# EAGLE board reaction_wheel_board (EAGLE 8.4.1)
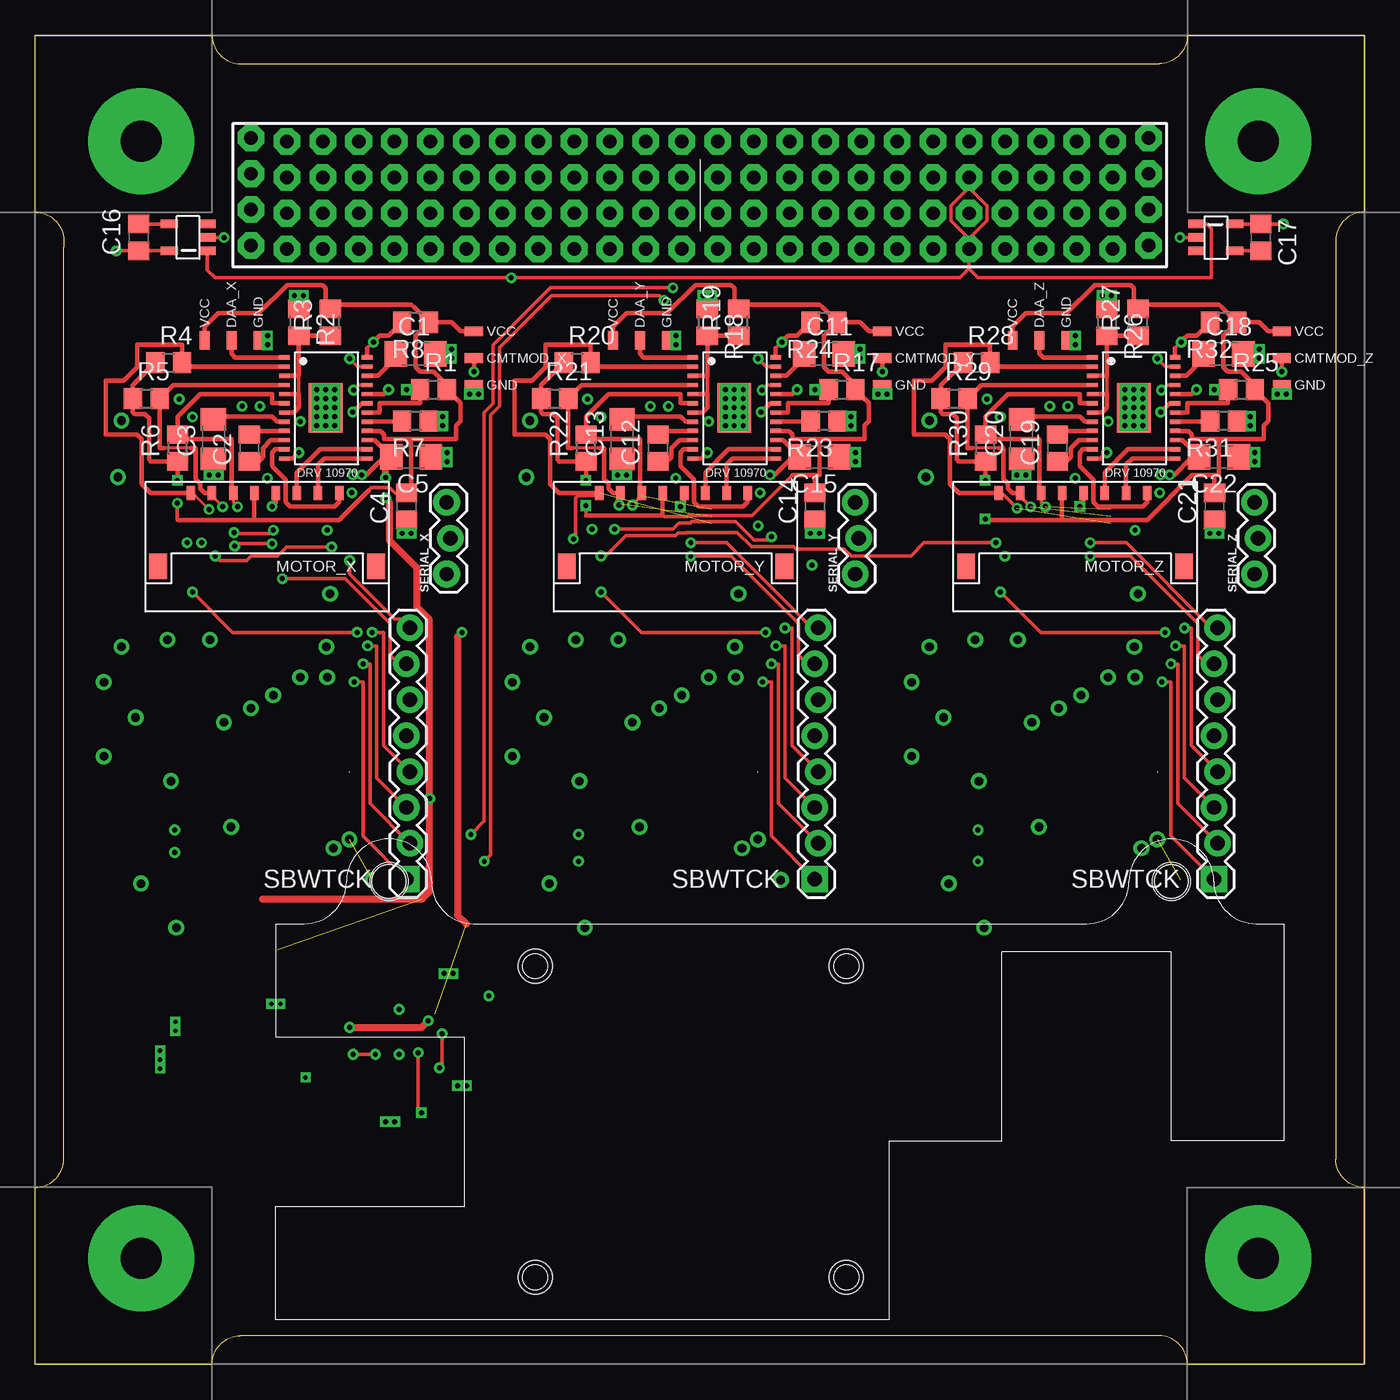
[diagram p0: board, top side]
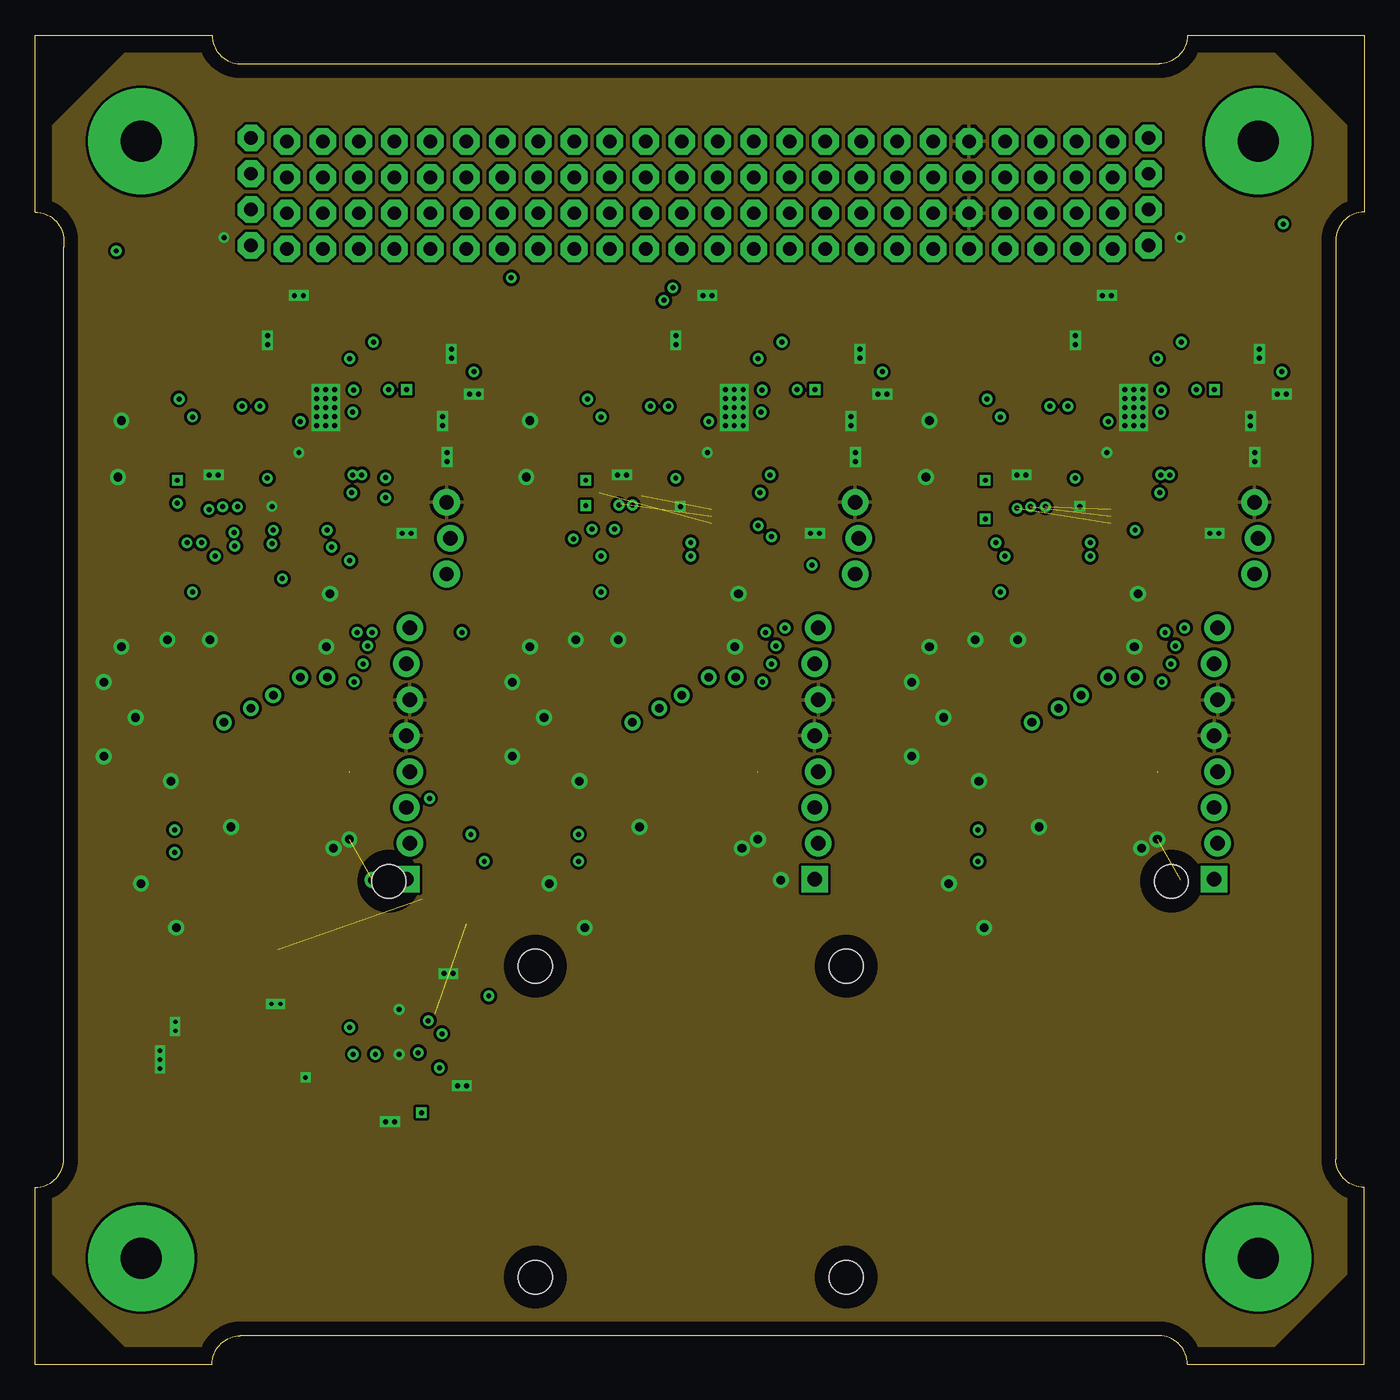
[diagram p1: board, inner layer Ground]
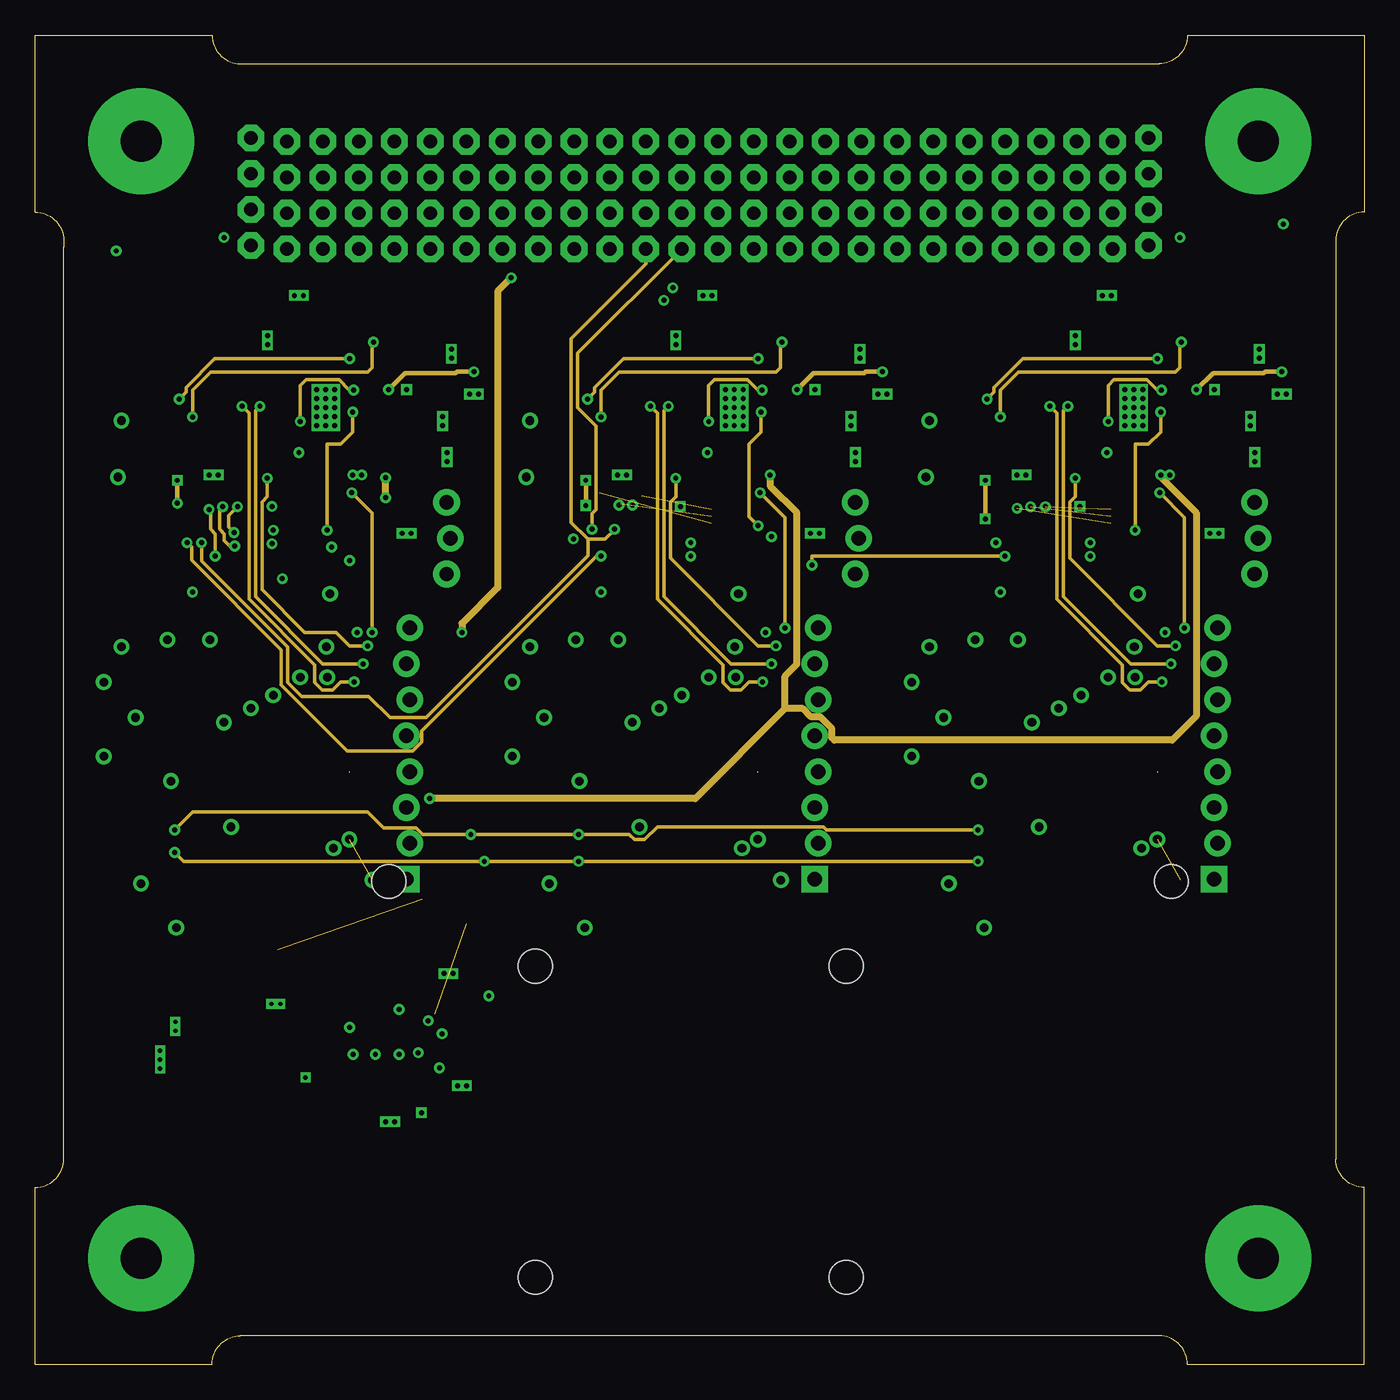
[diagram p2: board, inner layer Signal]
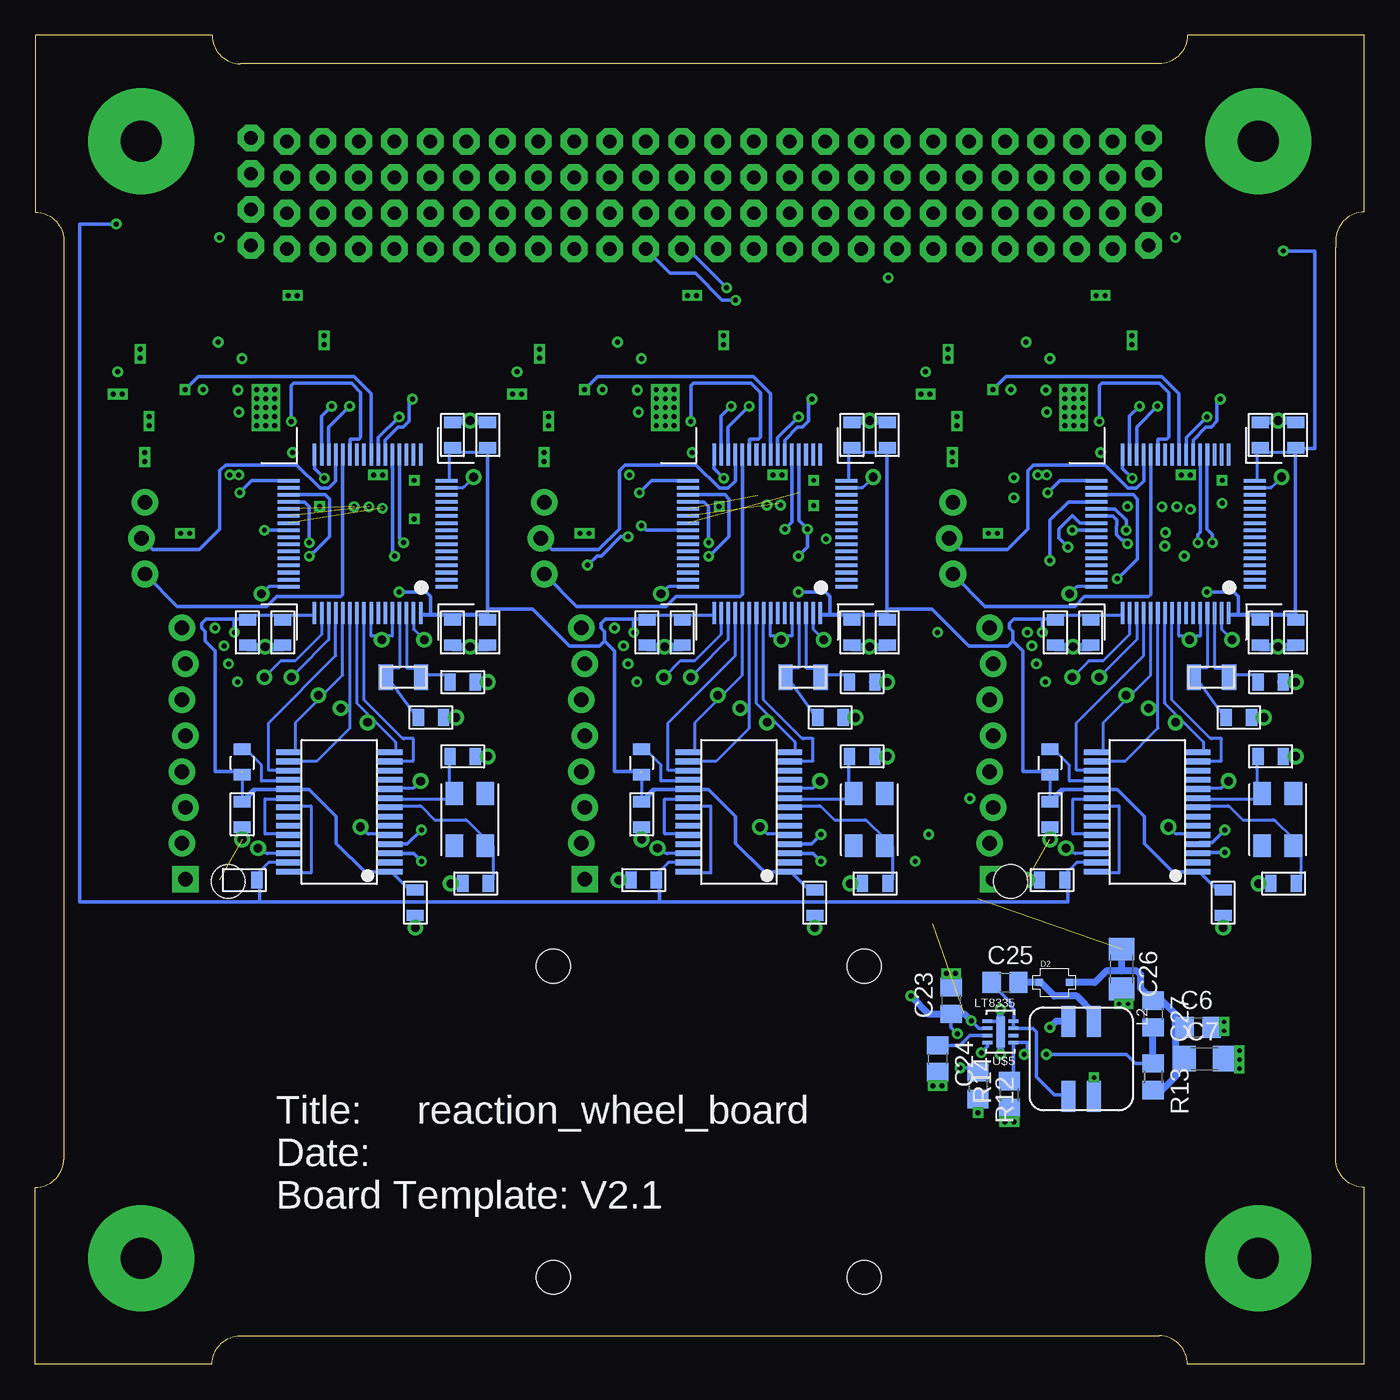
[diagram p3: board, bottom side, seen from below]

Size 94 x 94 mm. Coordinates in mm from the lower left corner, seen from the top.
Copper layers (1*2*3*16): Top 0.035mm / dielectric 1.5mm / Ground 0.035mm / dielectric 0.15mm / Signal 0.035mm / dielectric 0.2mm / Bottom 0.035mm
Design rules "default *": minimum track width 8mil, minimum drill 0.3mm, track to track 8mil, track to pad 8mil, pad to pad 8mil, via to via 8mil, smd to smd 0mil, copper to edge 40mil, drill to drill 8mil, minimum pad ring 10mil, minimum via ring 8mil, stop-mask expansion 4mil, vias tented up to drill 0mil, thermal gap 10mil
Net classes: 0 default: width 0.254 mm, drill 0.254 mm, clearance 0.152 mm

## Footprints (pad centres in the part's own frame; a part is rotated, then mirrored left to right if it is on the bottom)
C1206 = smd 1.6 x 1.8: 1 -1.4,0; 2 1.4,0
C0805 = smd 1.3 x 1.5: 1 -0.95,0; 2 0.95,0
0_OHM_JUMPER = smd 1.3 x 0.7: P$1 0,-1.9; P$2 0,0; P$3 0,1.9
SC-90 = smd 0.5 x 0.5: P$1 -1.05,0; P$2 1.05,0
WURTH_ELEKTRONIK_INDDD_744877001 = smd 1 x 2.2: P$1 -0.9,-2.65; P$2 -0.9,2.65; P$3 0.9,2.65; P$4 0.9,-2.65
SOT-23-5 = smd 0.6 x 1.2: P$1 -0.95,-1.35; P$2 0,-1.35; P$3 0.95,-1.35; P$4 0.95,1.35; P$5 -0.95,1.35
PICOLOCK_8 = smd 1.25 x 1.8: MNT@1 -2.605,5.2; MNT@2 12.805,5.2 | smd 0.6 x 1: P$1 0,0; P$2 1.5,0; P$3 3,0; P$4 4.5,0; P$5 6,0; P$6 7.5,0; P$7 9,0; P$8 10.5,0
R0805 = smd 1.3 x 1.5: 1 -0.95,0; 2 0.95,0
1X03_LOCK = drill 1.016 pad 1.88: 1 0,0.127; 2 2.54,-0.127; 3 5.08,0.127
BOARD_TEMPLATE_SECURED = drill 2.9 pad 7.5: P$1 -39.5,39.5; P$2 -39.5,-39.5; P$3 39.5,-39.5; P$4 39.5,39.5
PC104_CONNECTOR = drill 0.953 pad 1.88 octagon: P$1 -31.75,32.134; P$2 -31.75,34.674; P$3 -31.75,37.214; P$4 -31.75,39.754; P$5 -29.21,31.88; P$6 -29.21,34.42; P$7 -29.21,36.96; P$8 -29.21,39.5; P$9 -26.67,31.88; P$10 -26.67,34.42; P$11 -26.67,36.96; P$12 -26.67,39.5; P$13 -24.13,31.88; P$14 -24.13,34.42; P$15 -24.13,36.96; P$16 -24.13,39.5; P$17 -21.59,31.88; P$18 -21.59,34.42; P$19 -21.59,36.96; P$20 -21.59,39.5; P$21 -19.05,31.88; P$22 -19.05,34.42; P$23 -19.05,36.96; P$24 -19.05,39.5; P$25 -16.51,31.88; P$26 -16.51,34.42; P$27 -16.51,36.96; P$28 -16.51,39.5; P$29 -13.97,31.88; P$30 -13.97,34.42; P$31 -13.97,36.96; P$32 -13.97,39.5; P$33 -11.43,31.88; P$34 -11.43,34.42; P$35 -11.43,36.96; P$36 -11.43,39.5; P$37 -8.89,31.88; P$38 -8.89,34.42; P$39 -8.89,36.96; P$40 -8.89,39.5; P$41 -6.35,31.88; P$42 -6.35,34.42; P$43 -6.35,36.96; P$44 -6.35,39.5; P$45 -3.81,31.88; P$46 -3.81,34.42; P$47 -3.81,36.96; P$48 -3.81,39.5; P$49 -1.27,31.88; P$50 -1.27,34.42; P$51 -1.27,36.96; P$52 -1.27,39.5; P$53 1.27,31.88; P$54 1.27,34.42; P$55 1.27,36.96; P$56 1.27,39.5; P$57 3.81,31.88; P$58 3.81,34.42; P$59 3.81,36.96; P$60 3.81,39.5; P$61 6.35,31.88; P$62 6.35,34.42; P$63 6.35,36.96; P$64 6.35,39.5; P$65 8.89,31.88; P$66 8.89,34.42; P$67 8.89,36.96; P$68 8.89,39.5; P$69 11.43,31.88; P$70 11.43,34.42; P$71 11.43,36.96; P$72 11.43,39.5; P$73 13.97,31.88; P$74 13.97,34.42; P$75 13.97,36.96; P$76 13.97,39.5; P$77 16.51,31.88; P$78 16.51,34.42; P$79 16.51,36.96; P$80 16.51,39.5; P$81 19.05,31.88; P$82 19.05,34.42; P$83 19.05,36.96; P$84 19.05,39.5; P$85 21.59,31.88; P$86 21.59,34.42; P$87 21.59,36.96; P$88 21.59,39.5; P$89 24.13,31.88; P$90 24.13,34.42; P$91 24.13,36.96; P$92 24.13,39.5; P$93 26.67,31.88; P$94 26.67,34.42; P$95 26.67,36.96; P$96 26.67,39.5; P$97 29.21,31.88; P$98 29.21,34.42; P$99 29.21,36.96; P$100 29.21,39.5; P$101 31.75,32.134; P$102 31.75,34.674; P$103 31.75,37.214; P$104 31.75,39.754
MSP-CAN_BLOCK = smd 1.2 x 0.8: 1 -6,6.08; 2 -6,7.88; 3 -8.5,6.08; 4 -8.5,7.88; 9 -8.5,-6.08; 10 -8.5,-7.88; 11 -6,-6.08; 12 -6,-7.88; 13 8.5,6.08; 14 8.5,7.88; 15 6,6.08; 16 6,7.88; 23 8.875,18.955; 24 8.875,20.755; 25 8.875,17.045; 26 8.875,15.245; 27 -3.375,25.205; 28 -3.375,27.005 | smd 1 x 0.25: 3.3V@CAN1 -3.375,25.125; 3.3V@CAN2 8.875,18.875; 3.3V@MSP1 8.501,5.884; 3.3V@MSP2 -8.533,-5.962; 3.3V_ANALOG@MSP2 -8.482,5.904 | smd 0.8 x 1.2: 5 -5.83,10.5; 6 -7.63,10.5; 7 -3.58,13; 8 -5.38,13; 17 -8.545,24.75; 18 -6.745,24.75; 19 -5.83,15.75; 20 -7.63,15.75; 21 7.83,24.5; 22 9.63,24.5 | smd 0.25 x 1: 5V 7.65,24.5 | smd 1.75 x 0.4: CANH -1.6,21.96; CANL -1.6,22.61; P$65 -1.6,23.91; P$66 -1.6,23.26; P$69 -1.6,21.31; P$70 -1.6,20.66; P$71 -1.6,20.01; P$72 -1.6,19.36; P$73 -1.6,18.71; P$74 -1.6,18.06; P$75 -1.6,17.41; P$76 -1.6,16.76; P$77 -1.6,16.11; P$78 -1.6,15.46; P$79 5.6,15.46; P$80 5.6,16.11; P$81 5.6,16.76; P$82 5.6,17.41; P$83 5.6,18.06; P$84 5.6,18.71; P$85 5.6,19.36; P$86 5.6,20.01; P$87 5.6,20.66; P$88 5.6,21.31; P$89 5.6,21.96; P$90 5.6,22.61; P$91 5.6,23.26; P$92 5.6,23.91 | drill 0.61: GND@1 -3.375,27.875; GND@2 -5.875,24.75; GND@3 -3.75,17.5; GND@4 0.5,20.75; GND@5 -8.5,15.75; GND@7 -8.5,10.5; GND@8 -7.25,8; GND@9 -4,7.5; GND@10 -1,7.5; GND@11 7.75,22.25; GND@12 10.5,24.5; GND@13 8.875,21.625; GND@14 7.25,8; GND@15 7.5,4.25; GND@16 -7.5,-4; GND@17 -7.25,-8; GND@26 -6.25,13; P2.4_SPI-CS2 5.397,10.16; P2.7_SPI-CS3 7.303,10.16; P5.4_SPI-MOSI 3.487,11.434; P5.5_SPI-MISO 1.9,12.354; P5.6_SPI-CLK 0,13.348 | smd 1.55 x 0.25: P1.0_A0 -5.6,3.75; P1.1_A1 -5.6,3.25; P1.2_A2 -5.6,2.75; P1.3_A3 -5.6,-1.75; P1.4_A4 -5.6,-2.25; P1.5_A5 -5.6,-2.75; P1.6_GPIO/PWM 5.6,-0.75; P1.7_GPIO/PWM 5.6,-0.25; P2.1_RXD 5.6,-3.75; P2.2_GPIO/PWM 5.6,-3.25; P3.0_A12 -5.6,2.25; P3.1_A13 -5.6,1.75; P3.2_A14 -5.6,1.25; P3.3_A15 -5.6,0.75; P3.4_GPIO_DEBUG 5.6,-2.75; P3.5_GPIO_DEBUG 5.6,-2.25; P3.6_GPIO/PWM 5.6,-1.75; P3.7_GPIO/PWM 5.6,-1.25; P5.0_I2C-SDA-1 5.6,0.25; P5.1_I2C-SCL-1 5.6,0.75; P7.0_I2C-SDA-2 -5.6,-0.25; P7.1_I2C-SCL-2 -5.6,-0.75; P$8 -5.6,0.25; P$11 -5.6,-1.25; P$15 -5.6,-3.25; P$16 -5.6,-3.75; P$43 5.6,1.25; P$44 5.6,1.75; P$45 5.6,2.25; P$46 5.6,2.75; P$47 5.6,3.25; P$48 5.6,3.75 | smd 0.25 x 1.55: P2.0_TXD 3.75,-5.6; P2.5_GPIO 1.75,-5.6; P2.6_GPIO/PWM 2.25,-5.6; P4.0_GPIO -0.25,-5.6; P4.1_GPIO 0.25,-5.6; P4.2_GPIO 0.75,-5.6; P4.3_GPIO 1.25,-5.6; P7.2_SYNC1 -1.75,-5.6; P7.3_GPIO -1.25,-5.6; P7.4_GPIO -0.75,-5.6; P$17 -3.75,-5.6; P$18 -3.25,-5.6; P$19 -2.75,-5.6; P$49 3.75,5.6; P$50 3.25,5.6; P$51 2.75,5.6; P$52 2.25,5.6; P$53 1.75,5.6; P$54 1.25,5.6; P$55 0.75,5.6; P$56 0.25,5.6; P$57 -0.25,5.6; P$58 -0.75,5.6; P$59 -1.25,5.6; P$60 -1.75,5.6; P$61 -2.25,5.6; P$62 -2.75,5.6; P$63 -3.25,5.6; P$64 -3.75,5.6; PJ.3_SYNC2 -2.25,-5.6; SBWTCK 2.75,-5.6; SBWTDIO 3.25,-5.6 | smd 1 x 1.8: P$93 -3.79,10.16; P$94 -1.29,10.16 | smd 1.25 x 1.6: P$104 -6.13,18.38; P$105 -6.13,22.08; P$106 -8.33,22.08; P$107 -8.33,18.38
1X08_CONNECTOR = drill 1.016 pad 1.88: 2 2.54,-0.127; 3 5.08,0.127; 4 7.62,-0.127; 5 10.16,0.127; 6 12.7,-0.127; 7 15.24,0.127; 8 17.78,-0.127 | drill 1.016 pad 1.88 square: SBWTCK 0,0.127
DDB = smd 0.61 x 2.2: GND 0,0 | smd 0.7 x 0.25: P$1 -0.925,0.75; P$2 -0.925,0.25; P$3 -0.925,-0.25; P$4 -0.925,-0.75; P$5 0.925,-0.75; P$6 0.925,-0.25; P$7 0.925,0.25; P$8 0.925,0.75
DRV10970 = smd 0.3 x 0.75: BRKMOD -1.6,2.925; CMTMOD -0.95,2.925; CPN 2.3,-2.925; CPP 1.65,-2.925; CS 1,2.925; DAA -3.55,-2.925; FG -3.55,2.925; FR -2.9,2.925; GND@1 3.6,-2.925; PWM -0.3,2.925; RD 0.35,2.925; RETRY -2.25,2.925; U 2.95,2.925; U_HN -2.25,-2.925; U_HP -2.9,-2.925; V 3.6,2.925; V_HN -0.95,-2.925; V_HP -1.6,-2.925; VCP 1,-2.925; VINT 1.65,2.925; VM 2.3,2.925; W 2.95,-2.925; W_HN 0.35,-2.925; W_HP -0.3,-2.925 | smd 3.5 x 2.4: GND@2 0,0
REACTION_WHEEL_BRACKET = hole 2.39: -11,11; 11,11; 11,-11; -11,-11; 21.35,-17; -34,-17

## Placement (x,y rotation side)
C1  2.2uF  [C1206]  26.9,71.47 0 top
C2  0.1uF  [C0805]  15.15,64.81 90 top
C3  1uF  [C1206]  12.61,65.44 90 top
C4  0.1uF  [C0805]  26.26,60.68 90 top
C5  1uF  [C1206]  26.58,64.17 180 top
C6  10 μF  [C0805]  11.76,23.82 0 bottom
C7  47 μF  [C1206]  11.31,21.6 0 bottom
C11  2.2uF  [C1206]  55.79,71.47 0 top
C12  0.1uF  [C0805]  44.04,64.81 90 top
C13  1uF  [C1206]  41.5,65.44 90 top
C14  0.1uF  [C0805]  55.16,60.68 90 top
C15  1uF  [C1206]  55.47,64.17 180 top
C16  0.01 μF  [C0805]  7.31,79.7 90 top
C17  0.01 μF  [C0805]  86.69,79.7 270 top
C18  2.2uF  [C1206]  84.05,71.47 0 top
C19  0.1uF  [C0805]  72.3,64.81 90 top
C20  1uF  [C1206]  69.76,65.44 90 top
C21  0.1uF  [C0805]  83.41,60.68 90 top
C22  1uF  [C1206]  83.73,64.17 180 top
C23  2.2 μF  [C0805]  29.22,25.73 90 bottom
C24  2.2 μF  [C0805]  30.17,21.6 270 bottom
C25  1 μF  [C0805]  25.41,27 0 bottom
C26  22 μF  [C1206]  17.16,27.95 270 bottom
C27  5.6 pF  [C0805]  14.93,24.78 270 bottom
CMTMOD_X  0_OHM_JUMPER  [0_OHM_JUMPER]  31.03,71.16 0 top
CMTMOD_Y  0_OHM_JUMPER  [0_OHM_JUMPER]  59.92,71.16 0 top
CMTMOD_Z  0_OHM_JUMPER  [0_OHM_JUMPER]  88.18,71.16 0 top
D2  PMEG6010CEJ  [SC-90]  21.92,27 0 bottom
DAA_X  0_OHM_JUMPER  [0_OHM_JUMPER]  13.88,72.43 90 top
DAA_Y  0_OHM_JUMPER  [0_OHM_JUMPER]  42.77,72.43 90 top
DAA_Z  0_OHM_JUMPER  [0_OHM_JUMPER]  71.03,72.43 90 top
L2  WURTH_ELEKTRONIK_INDDD_744877001  [WURTH_ELEKTRONIK_INDDD_744877001]  20.01,21.6 180 bottom
LDO_3V3  LINEAR_LDO_LT1761-X  [SOT-23-5]  10.81,79.7 90 top
LDO_5V  LINEAR_LDO_LT1761-X  [SOT-23-5]  83.51,79.7 270 top
MOTOR_X  PICOLOCK_8  [PICOLOCK_8]  21.5,61.63 180 top
MOTOR_Y  PICOLOCK_8  [PICOLOCK_8]  50.39,61.63 180 top
MOTOR_Z  PICOLOCK_8  [PICOLOCK_8]  78.65,61.63 180 top
R1  3.3K  [R0805]  28.17,68.93 0 top
R2  3.3K  [R0805]  18.64,73.7 270 top
R3  3.3K  [R0805]  20.87,73.7 90 top
R4  10K  [R0805]  9.44,70.84 0 top
R5  10K  [R0805]  7.85,68.3 0 top
R6  10K  [R0805]  10.07,64.81 90 top
R7  [R0805]  26.9,66.71 180 top
R8  3.3K  [R0805]  26.9,73.7 180 top
R12  1 kΩ  [R0805]  27.32,19.7 270 bottom
R13  330 kΩ  [R0805]  14.93,20.33 270 bottom
R14  120 kΩ  [R0805]  25.09,19.06 90 bottom
R17  3.3K  [R0805]  57.06,68.93 0 top
R18  3.3K  [R0805]  47.54,73.7 270 top
R19  3.3K  [R0805]  49.76,73.7 90 top
R20  10K  [R0805]  38.33,70.84 0 top
R21  10K  [R0805]  36.74,68.3 0 top
R22  10K  [R0805]  38.96,64.81 90 top
R23  [R0805]  55.79,66.71 180 top
R24  3.3K  [R0805]  55.79,73.7 180 top
R25  3.3K  [R0805]  85.32,68.93 0 top
R26  3.3K  [R0805]  75.79,73.7 270 top
R27  3.3K  [R0805]  78.02,73.7 90 top
R28  10K  [R0805]  66.59,70.84 0 top
R29  10K  [R0805]  65,68.3 0 top
R30  10K  [R0805]  67.22,64.81 90 top
R31  [R0805]  84.05,66.71 180 top
R32  3.3K  [R0805]  84.05,73.7 180 top
SERIAL_X  [1X03_LOCK]  29.22,55.89 90 top
SERIAL_Y  [1X03_LOCK]  58.11,55.89 90 top
SERIAL_Z  [1X03_LOCK]  86.37,55.89 90 top
U$1  BOARD_TEMPLATESERCURED  [BOARD_TEMPLATE_SECURED]  47,47 0 top
U$2  PC104_CONNECTOR  [PC104_CONNECTOR]  47,47 0 top
U$3  MSP-CAN_BLOCK  [MSP-CAN_BLOCK]  13.35,58.75 180 bottom
U$4  PROGRAM/DEBUG_PORT  [1X08_CONNECTOR]  26.36,34.3 90 top
U$5  LT8335  [DDB]  25.73,23.51 180 bottom
U$7  DRV10970  [DRV10970]  20.55,67.66 270 top
U$9  REACTION_WHEEL_BRACKET  [REACTION_WHEEL_BRACKET]  46.37,17.16 180 top
U$10  MSP-CAN_BLOCK  [MSP-CAN_BLOCK]  42.24,58.75 180 bottom
U$11  PROGRAM/DEBUG_PORT  [1X08_CONNECTOR]  55.26,34.3 90 top
U$12  DRV10970  [DRV10970]  49.44,67.66 270 top
U$13  MSP-CAN_BLOCK  [MSP-CAN_BLOCK]  70.5,58.75 180 bottom
U$14  PROGRAM/DEBUG_PORT  [1X08_CONNECTOR]  83.51,34.3 90 top
U$15  DRV10970  [DRV10970]  77.7,67.66 270 top

## Library data of the parts
C1-C7 C11-C27 R1-R8 R12-R14 R17-R32 = rcl
CMTMOD_X CMTMOD_Y CMTMOD_Z D2 DAA_X DAA_Y DAA_Z L2 LDO_3V3 LDO_5V MOTOR_X MOTOR_Y MOTOR_Z U$1-U$5 U$7 U$9-U$15 = DubSat1 Components
SERIAL_X SERIAL_Y SERIAL_Z = SparkFun-Connectors

## Nets
+3V3: C16.1 LDO_3V3.P$5 U$3.3.3V@CAN1 U$3.3.3V@CAN2 U$3.3.3V@MSP1 U$3.3.3V@MSP2 U$3.3.3V_ANALOG@MSP2 U$10.3.3V@CAN1 U$10.3.3V@CAN2 U$10.3.3V@MSP1 U$10.3.3V@MSP2 U$10.3.3V_ANALOG@MSP2 U$13.3.3V@CAN1 U$13.3.3V@CAN2 U$13.3.3V@MSP1 U$13.3.3V@MSP2 U$13.3.3V_ANALOG@MSP2
+5V: C17.1 LDO_5V.P$5 U$3.5V U$10.5V U$13.5V
BRKMOD_X: U$3.P4.3_GPIO U$7.BRKMOD
BRKMOD_Y: U$10.P4.3_GPIO U$12.BRKMOD
BRKMOD_Z: U$13.P4.3_GPIO U$15.BRKMOD
CANH: U$2.P$53 U$3.CANH U$10.CANH U$13.CANH
CANL: U$2.P$57 U$3.CANL U$10.CANL U$13.CANL
CMTMOD_X: CMTMOD_X.P$2 U$7.CMTMOD
CMTMOD_Y: CMTMOD_Y.P$2 U$12.CMTMOD
CMTMOD_Z: CMTMOD_Z.P$2 U$15.CMTMOD
CPN_X: C2.1 U$7.CPN
CPN_Y: C12.1 U$12.CPN
CPN_Z: C19.1 U$15.CPN
CPP_X: C2.2 U$7.CPP
CPP_Y: C12.2 U$12.CPP
CPP_Z: C19.2 U$15.CPP
CS_X: R7.2 U$7.CS
CS_Y: R23.2 U$12.CS
CS_Z: R31.2 U$15.CS
DAA_X: DAA_X.P$2 U$7.DAA
DAA_Y: DAA_Y.P$2 U$12.DAA
DAA_Z: DAA_Z.P$2 U$15.DAA
EN_UVLO: R12.2 U$5.P$8
FBX: C27.2 R13.1 R14.2 U$5.P$1
FG_X: R8.2 U$3.P7.4_GPIO U$7.FG
FG_Y: R24.2 U$10.P7.4_GPIO U$12.FG
FG_Z: R32.2 U$13.P7.4_GPIO U$15.FG
FR_X: U$3.P7.3_GPIO U$7.FR
FR_Y: U$10.P7.3_GPIO U$12.FR
FR_Z: U$13.P7.3_GPIO U$15.FR
GND: C1.2 C3.1 C4.1 C5.1 C6.2 C7.2 C11.2 C13.1 C14.1 C15.1 C18.2 C20.1 C21.1 C22.1 C23.2 C24.2 C26.2 CMTMOD_X.P$1 CMTMOD_Y.P$1 CMTMOD_Z.P$1 DAA_X.P$1 DAA_Y.P$1 DAA_Z.P$1 L2.P$2 LDO_3V3.P$2 LDO_5V.P$2 MOTOR_X.P$4 MOTOR_Y.P$4 MOTOR_Z.P$4 R2.1 R7.1 R14.1 R18.1 R23.1 R26.1 R31.1 SERIAL_X.3 SERIAL_Y.3 SERIAL_Z.3 U$2.P$82 U$2.P$84 U$3.GND@1 U$3.GND@2 U$3.GND@3 U$3.GND@4 U$3.GND@5 U$3.GND@7 U$3.GND@8 U$3.GND@9 U$3.GND@10 U$3.GND@11 U$3.GND@12 U$3.GND@13 U$3.GND@14 U$3.GND@15 U$3.GND@16 U$3.GND@17 U$3.GND@26 U$4.5 U$4.6 U$5.GND U$5.P$5 U$7.GND@1 U$7.GND@2 U$10.GND@1 U$10.GND@2 U$10.GND@3 U$10.GND@4 U$10.GND@5 U$10.GND@7 U$10.GND@8 U$10.GND@9 U$10.GND@10 U$10.GND@11 U$10.GND@12 U$10.GND@13 U$10.GND@14 U$10.GND@15 U$10.GND@16 U$10.GND@17 U$10.GND@26 U$11.5 U$11.6 U$12.GND@1 U$12.GND@2 U$13.GND@1 U$13.GND@2 U$13.GND@3 U$13.GND@4 U$13.GND@5 U$13.GND@7 U$13.GND@8 U$13.GND@9 U$13.GND@10 U$13.GND@11 U$13.GND@12 U$13.GND@13 U$13.GND@14 U$13.GND@15 U$13.GND@16 U$13.GND@17 U$13.GND@26 U$14.5 U$14.6 U$15.GND@1 U$15.GND@2
GPIO_DEBUG_3.4_X: U$3.P3.4_GPIO_DEBUG U$4.7
GPIO_DEBUG_3.4_Y: U$10.P3.4_GPIO_DEBUG U$11.7
GPIO_DEBUG_3.4_Z: U$13.P3.4_GPIO_DEBUG U$14.7
GPIO_DEBUG_3.5_X: U$3.P3.5_GPIO_DEBUG U$4.8
GPIO_DEBUG_3.5_Y: U$10.P3.5_GPIO_DEBUG U$11.8
GPIO_DEBUG_3.5_Z: U$13.P3.5_GPIO_DEBUG U$14.8
HN_X: R2.2 R3.1 U$7.U_HN U$7.V_HN U$7.W_HN
HN_Y: R18.2 R19.1 U$12.U_HN U$12.V_HN U$12.W_HN
HN_Z: R26.2 R27.1 U$15.U_HN U$15.V_HN U$15.W_HN
HP_U_X: MOTOR_X.P$8 R4.2 U$3.P1.6_GPIO/PWM U$7.U_HP
HP_U_Y: MOTOR_Y.P$8 R20.2 U$10.P1.6_GPIO/PWM U$12.U_HP
HP_U_Z: MOTOR_Z.P$8 R28.2 U$13.P1.6_GPIO/PWM U$15.U_HP
HP_V_X: MOTOR_X.P$7 R5.2 U$3.P3.7_GPIO/PWM U$7.V_HP
HP_V_Y: MOTOR_Y.P$7 R21.2 U$10.P3.7_GPIO/PWM U$12.V_HP
HP_V_Z: MOTOR_Z.P$7 R29.2 U$13.P3.7_GPIO/PWM U$15.V_HP
HP_W_X: MOTOR_X.P$6 R6.2 U$3.P3.6_GPIO/PWM U$7.W_HP
HP_W_Y: MOTOR_Y.P$6 R22.2 U$10.P3.6_GPIO/PWM U$12.W_HP
HP_W_Z: MOTOR_Z.P$6 R30.2 U$13.P3.6_GPIO/PWM U$15.W_HP
INT_VCC: C24.1 U$5.P$7
M_X_RX: SERIAL_X.2 U$3.P2.6_GPIO/PWM
M_X_TX: SERIAL_X.1 U$3.P2.5_GPIO
M_Y_RX: SERIAL_Y.2 U$10.P2.6_GPIO/PWM
M_Y_TX: SERIAL_Y.1 U$10.P2.5_GPIO
M_Z_RX: SERIAL_Z.2 U$13.P2.6_GPIO/PWM
M_Z_TX: SERIAL_Z.1 U$13.P2.5_GPIO
N$1: C25.2 D2.P$1 L2.P$1
N$13: C17.2 LDO_5V.P$4
N$14: C16.2 LDO_3V3.P$4
PWM_X: U$3.P1.7_GPIO/PWM U$7.PWM
PWM_Y: U$10.P1.7_GPIO/PWM U$12.PWM
PWM_Z: U$13.P1.7_GPIO/PWM U$15.PWM
RD_X: R1.1 U$3.P4.0_GPIO U$7.RD
RD_Y: R17.1 U$10.P4.0_GPIO U$12.RD
RD_Z: R25.1 U$13.P4.0_GPIO U$15.RD
RETRY_X: C1.1 U$7.RETRY
RETRY_Y: C11.1 U$12.RETRY
RETRY_Z: C18.1 U$15.RETRY
RXD_X: U$3.P2.1_RXD U$4.4
RXD_Y: U$10.P2.1_RXD U$11.4
RXD_Z: U$13.P2.1_RXD U$14.4
SBWTCK_X: U$3.SBWTCK U$4.SBWTCK
SBWTCK_Y: U$10.SBWTCK U$11.SBWTCK
SBWTCK_Z: U$13.SBWTCK U$14.SBWTCK
SBWTDIO_X: U$3.SBWTDIO U$4.2
SBWTDIO_Y: U$10.SBWTDIO U$11.2
SBWTDIO_Z: U$13.SBWTDIO U$14.2
SW: C25.1 L2.P$3 U$5.P$3 U$5.P$4
SYNC1: U$2.P$45 U$3.P7.2_SYNC1 U$10.P7.2_SYNC1 U$13.P7.2_SYNC1
SYNC2: U$2.P$49 U$3.PJ.3_SYNC2 U$10.PJ.3_SYNC2 U$13.PJ.3_SYNC2
TXD_X: U$3.P2.0_TXD U$4.3
TXD_Y: U$10.P2.0_TXD U$11.3
TXD_Z: U$13.P2.0_TXD U$14.3
U_X: MOTOR_X.P$3 U$7.U
U_Y: MOTOR_Y.P$3 U$12.U
U_Z: MOTOR_Z.P$3 U$15.U
V_X: MOTOR_X.P$2 U$7.V
V_Y: MOTOR_Y.P$2 U$12.V
V_Z: MOTOR_Z.P$2 U$15.V
VBAT: C23.1 L2.P$4 LDO_3V3.P$1 LDO_5V.P$1 R12.1 U$2.P$81 U$2.P$83 U$5.P$6
VCP_X: C3.2 U$7.VCP
VCP_Y: C13.2 U$12.VCP
VCP_Z: C20.2 U$15.VCP
VINT_X: C4.2 CMTMOD_X.P$3 DAA_X.P$3 MOTOR_X.P$5 R1.2 R3.2 R4.1 R5.1 R6.1 R8.1 U$7.VINT
VINT_Y: C14.2 CMTMOD_Y.P$3 DAA_Y.P$3 MOTOR_Y.P$5 R17.2 R19.2 R20.1 R21.1 R22.1 R24.1 U$12.VINT
VINT_Z: C21.2 CMTMOD_Z.P$3 DAA_Z.P$3 MOTOR_Z.P$5 R25.2 R27.2 R28.1 R29.1 R30.1 R32.1 U$15.VINT
VM: C5.2 C6.1 C7.1 C15.2 C22.2 C26.1 C27.1 D2.P$2 R13.2 U$7.VM U$12.VM U$15.VM
W_X: MOTOR_X.P$1 U$7.W
W_Y: MOTOR_Y.P$1 U$12.W
W_Z: MOTOR_Z.P$1 U$15.W

## Tracks (layer width: path | path; a pad name or v marks a point on that pad's centre or on a via)
+3V3  (via drill 0.35)  (3 unrouted)
  Top 0.254: LDO_3V3.P$5 C16.1 v5.73,78.75 | v11.12,54.62 13.98,51.77 v22.77,51.77 | v40.02,54.62 42.87,51.77 v51.66,51.77 | v68.27,54.62 71.12,51.77 v79.92,51.77
  Bottom 0.254: v5.73,78.75 3.5,78.75 3.5,64.78 4.74,64.78 U$3.3.3V@MSP2 4.86,64.66 U$3.3.3V_ANALOG@MSP2 5.05,53.03 8.9,53.03 | U$3.3.3V@CAN1 10.45,33.62 11.44,34.62 11.44,34.68 11.57,34.81 13.54,34.81 15.57,36.84 15.57,38.75 17.47,40.65 21.44,40.65 U$3.3.3V@CAN2 | U$3.3.3V@MSP1 21.99,52.72 22.78,52.72 | 22.78,52.72 24.78,52.72 25.09,52.4 25.09,52.08 24.85,51.84 24.85,51.15 | 24.85,51.15 24.14,50.44 24.14,41.92 22.23,41.92 | 8.9,53.03 9.54,53.03 8.9,53.03 | 8.9,53.03 8.9,54.3 9.22,54.62 v11.12,54.62 | v22.77,51.77 v22.78,51.77 22.78,52.72 | 33.76,53.43 33.76,64.66 U$10.3.3V@MSP2 33.63,64.78 | 33.76,53.43 U$10.3.3V_ANALOG@MSP2 33.94,53.03 37.79,53.03 | U$10.3.3V@CAN1 39.34,33.62 40.33,34.62 40.33,34.68 40.46,34.81 42.43,34.81 44.46,36.84 44.46,38.75 46.37,40.65 50.34,40.65 U$10.3.3V@CAN2 | U$10.3.3V@MSP1 50.89,52.72 51.67,52.72 | 51.67,52.72 53.67,52.72 53.98,52.4 53.98,52.08 53.74,51.84 53.74,51.15 | 53.74,51.15 53.03,50.44 53.03,41.92 51.13,41.92 | 37.79,53.03 38.43,53.03 37.79,53.03 | 37.79,53.03 37.79,54.3 38.11,54.62 v40.02,54.62 | v51.66,51.77 v51.67,51.77 51.67,52.72 | 62.01,53.43 62.01,64.66 U$13.3.3V@MSP2 61.89,64.78 | 62.01,53.43 U$13.3.3V_ANALOG@MSP2 62.2,53.03 66.05,53.03 | U$13.3.3V@CAN1 67.59,33.62 68.59,34.62 68.59,34.68 68.72,34.81 70.69,34.81 72.72,36.84 72.72,38.75 74.62,40.65 78.59,40.65 U$13.3.3V@CAN2 | U$13.3.3V@MSP1 79.14,52.72 79.92,52.72 | 79.92,52.72 81.92,52.72 82.24,52.4 82.24,52.08 82,51.84 82,51.15 81.29,50.44 81.29,41.92 79.39,41.92 | 66.05,53.03 66.69,53.03 66.05,53.03 | 66.05,53.03 66.05,54.3 66.37,54.62 v68.27,54.62 | v79.92,51.77 79.92,52.72
  Bottom 0.254: 24.85,51.15 25.19,50.81 27.95,50.81 30.57,53.43 33.76,53.43 | 53.74,51.15 54.08,50.81 56.21,50.81 58.83,53.43 62.01,53.43
+5V  (via drill 0.35)
  Top 0.254: LDO_5V.P$5 C17.1 v88.27,80.65 v88.28,80.66
  Bottom 0.254: U$3.5V 20.96,34.22 20.96,32.71 49.86,32.71 | 49.86,32.71 49.86,33.32 49.89,33.35 U$10.5V | 49.86,32.71 78.11,32.71 | 78.11,32.71 78.11,33.32 78.14,33.35 U$13.5V | 78.11,32.71 90.86,32.71 90.86,80.66 v88.28,80.66
BRKMOD_X  (via drill 0.35)
  Top 0.254: U$7.BRKMOD 22.87,69.27 v22.52,68.91
  Signal 0.254: v22.52,68.91 22.21,68.91 21.48,69.64 19.16,69.64 18.74,69.22 v18.74,66.69
  Bottom 0.254: U$3.P4.3_GPIO 14.6,65.42 14.56,65.45 13.94,65.45 13.83,65.57 13.83,68.74 14.49,69.4 18.57,69.4 18.74,69.22 v18.74,66.69
BRKMOD_Y  (via drill 0.35)
  Top 0.254: U$12.BRKMOD 51.77,69.27 v51.41,68.91
  Signal 0.254: v51.41,68.91 51.11,68.91 50.37,69.64 48.05,69.64 47.63,69.22 v47.63,66.69
  Bottom 0.254: U$10.P4.3_GPIO 43.49,65.42 43.45,65.45 42.84,65.45 42.72,65.57 42.72,68.74 43.38,69.4 47.46,69.4 47.63,69.22 v47.63,66.69
BRKMOD_Z  (via drill 0.35)
  Top 0.254: U$15.BRKMOD 80.02,69.27 v79.67,68.91
  Signal 0.254: v79.67,68.91 79.36,68.91 78.63,69.64 76.31,69.64 75.89,69.22 v75.89,66.69
  Bottom 0.254: U$13.P4.3_GPIO 71.75,65.42 71.71,65.45 71.09,65.45 70.98,65.57 70.98,68.74 71.64,69.4 75.72,69.4 75.89,69.22 v75.89,66.69
CANH  (via drill 0.35)
  Top 0.254: v30.81,37.48 31.76,38.43 31.76,67.32 32.39,67.95 32.39,72.08 36.45,76.14 v45.09,76.14
  Signal 0.254: v9.85,37.79 11.12,39.06 23.51,39.06 24.64,37.93 26.94,37.93 27.4,37.48 v30.81,37.48 v38.43,37.48 42,37.48 42.37,37.11 43.11,37.11 44.01,38.01 55.76,38.01 55.97,37.79 v66.69,37.79
  Bottom 0.254: U$3.CANH 11.63,36.91 10.73,36.91 10.54,37.1 10.54,37.11 v9.85,37.79 | v38.43,37.48 39.12,36.79 U$10.CANH | v66.69,37.79 67.69,36.79 U$13.CANH | v45.09,76.14 47.84,78.88 U$2.P$53
CANL  (via drill 0.35)
  Top 0.254: v31.76,35.57 32.22,36.03 32.22,67.13 32.85,67.77 32.85,71.89 36.53,75.57 44.15,75.57 v44.46,75.26
  Signal 0.254: v9.85,36.2 10.49,35.57 v31.76,35.57 v38.43,35.57 v66.69,35.57
  Bottom 0.254: U$3.CANL 11.68,36.2 v9.85,36.2 | v38.43,35.57 39,36.14 U$10.CANL | v66.69,35.57 67.25,36.14 U$13.CANL | v44.46,75.26 45.41,75.26 47.32,77.16 49.09,77.16 U$2.P$57
CMTMOD_X  (via drill 0.35)
  Top 0.305: U$7.CMTMOD 24.67,68.61 v24.99,68.94 | v31.03,70.2 CMTMOD_X.P$2
  Signal 0.305: v31.03,70.2 29.84,70.2 29.74,70.11 26.16,70.11 v24.99,68.94
CMTMOD_Y  (via drill 0.35)
  Top 0.305: U$12.CMTMOD 53.57,68.61 v53.89,68.94 | v59.92,70.2 CMTMOD_Y.P$2
  Signal 0.305: v59.92,70.2 58.73,70.2 58.63,70.11 55.06,70.11 v53.89,68.94
CMTMOD_Z  (via drill 0.35)
  Top 0.305: U$15.CMTMOD 81.82,68.61 v82.14,68.94 | v88.18,70.2 CMTMOD_Z.P$2
  Signal 0.305: v88.18,70.2 86.99,70.2 86.89,70.11 83.31,70.11 v82.14,68.94
CPN_X
  Top 0.305: U$7.CPN 16.66,65.36 16.1,64.81 16.1,64.17 15.79,63.86 C2.1
CPN_Y
  Top 0.305: U$12.CPN 45.55,65.36 45,64.81 45,64.17 44.68,63.86 C12.1
CPN_Z
  Top 0.305: U$15.CPN 73.81,65.36 73.25,64.81 73.25,64.17 72.94,63.86 C19.1
CPP_X
  Top 0.305: U$7.CPP 15.09,66.02 C2.2
CPP_Y
  Top 0.305: U$12.CPP 43.98,66.02 C12.2
CPP_Z
  Top 0.305: U$15.CPP 72.24,66.02 C19.2
CS_X
  Top 0.305: U$7.CS 25.58,66.67 R7.2
CS_Y
  Top 0.305: U$12.CS 54.48,66.67 R23.2
CS_Z
  Top 0.305: U$15.CS 82.73,66.67 R31.2
DAA_X
  Top 0.305: U$7.DAA 14.14,71.22 13.88,71.47 DAA_X.P$2
DAA_Y
  Top 0.305: U$12.DAA 43.03,71.22 42.77,71.47 DAA_Y.P$2
DAA_Z
  Top 0.305: U$15.DAA 71.29,71.22 71.03,71.47 DAA_Z.P$2
EN_UVLO  (via drill 0.35)
  Top 0.254: v27.32,17.79 27.09,18.02 v27.09,22.03
  Bottom 0.254: R12.2 v27.32,17.79 | v27.09,22.03 26.65,22.47 U$5.P$8
FBX  (via drill 0.35)
  Top 0.254: v24.05,21.92 v22.48,21.92
  Bottom 0.254: R14.2 24.8,20.3 U$5.P$1 23.82,22.76 23.82,22.15 v24.05,21.92 | v22.48,21.92 16.84,21.92 16.2,21.28 R13.1
  Bottom 0.508: C27.2 R13.1
FG_X  (via drill 0.35)
  Top 0.254: 23.47,71.86 v23.92,72.3
  Top 0.305: U$7.FG 23.47,71.86 | v23.92,72.3 24.36,72.75 25,72.75 R8.2
  Signal 0.254: v23.92,72.3 23.82,72.21 23.82,70.5 23.51,70.18 12.39,70.18 11.12,68.91 v11.12,67
  Bottom 0.254: v11.12,67 12.6,65.53 U$3.P7.4_GPIO
FG_Y  (via drill 0.35)
  Top 0.254: 52.37,71.86 v52.81,72.3
  Top 0.305: U$12.FG 52.37,71.86 | v52.81,72.3 53.25,72.75 53.89,72.75 R24.2
  Signal 0.254: v52.81,72.3 52.72,72.21 52.72,70.5 52.4,70.18 41.29,70.18 40.02,68.91 v40.02,67
  Bottom 0.254: v40.02,67 41.49,65.53 U$10.P7.4_GPIO
FG_Z  (via drill 0.35)
  Top 0.254: 80.62,71.86 v81.07,72.3
  Top 0.305: U$15.FG 80.62,71.86 | v81.07,72.3 81.51,72.75 82.15,72.75 R32.2
  Signal 0.254: v81.07,72.3 80.97,72.21 80.97,70.5 80.66,70.18 69.54,70.18 68.27,68.91 v68.27,67
  Bottom 0.254: v68.27,67 69.75,65.53 U$13.P7.4_GPIO
FR_X  (via drill 0.35)
  Top 0.254: U$7.FR 22.8,70.56 v22.23,71.13
  Signal 0.254: v10.17,68.27 10.67,68.77 10.67,69.1 12.7,71.13 v22.23,71.13
  Bottom 0.254: U$3.P7.3_GPIO 12.1,65.38 11.18,66.29 10.83,66.29 10.41,66.71 10.41,68.03 v10.17,68.27
FR_Y  (via drill 0.35)
  Top 0.254: U$12.FR 51.69,70.56 v51.13,71.13
  Signal 0.254: v39.06,68.27 39.56,68.77 39.56,69.1 41.59,71.13 v51.13,71.13
  Bottom 0.254: U$10.P7.3_GPIO 40.99,65.38 40.08,66.29 39.72,66.29 39.31,66.71 39.31,68.03 v39.06,68.27
FR_Z  (via drill 0.35)
  Top 0.254: U$15.FR 79.95,70.56 v79.39,71.13
  Signal 0.254: v67.32,68.27 67.81,68.77 67.81,69.1 69.85,71.13 v79.39,71.13
  Bottom 0.254: U$13.P7.3_GPIO 69.25,65.38 68.33,66.29 67.98,66.29 67.56,66.71 67.56,68.03 v67.32,68.27
GND  (via drill 0.3, 0.35)  (2 unrouted)
  Top 0.254: v30.71,68.62 30.71,68.94 CMTMOD_X.P$1 31.34,68.94 v31.34,68.62 | v25.95,58.77 25.95,59.41 C4.1 | C4.1 | v26.58,58.77 26.58,59.41 C4.1 | v12.29,62.9 12.29,63.73 C3.1 12.93,63.73 v12.93,62.9 | v16.42,72.11 16.1,72.11 DAA_X.P$1 16.1,72.75 v16.42,72.75 | v18.96,75.6 18.96,74.97 R2.1 18.33,74.97 v18.33,75.6 | v29.44,71.79 28.62,71.79 C1.2 28.62,71.16 v29.44,71.16 | v28.8,67.03 28.17,67.03 R7.1 arc-90 v28.8,66.39 | v29.12,64.49 28.3,64.49 28.07,64.27 | 28.07,64.27 C5.1 | v29.12,63.86 28.49,63.86 28.07,64.27 | v20.55,67.03 v21.18,66.39 | v20.55,67.03 v20.55,66.39 U$7.GND@2 | v20.55,67.03 v19.91,66.39 | U$7.GND@2 v19.91,67.03 | U$7.GND@2 v20.55,67.03 | U$7.GND@2 v21.18,67.03 | U$7.GND@2 v21.18,67.67 | U$7.GND@2 v19.91,67.67 | U$7.GND@2 v19.91,68.3 | U$7.GND@2 v21.18,68.3 | v20.55,68.3 v21.18,68.94 | U$7.GND@2 v20.55,68.94 | U$7.GND@2 v20.55,68.3 | v20.55,68.3 v19.91,68.94 | LDO_5V.P$2 v80.97,79.7 | LDO_3V3.P$2 v13.35,79.7 | v59.6,68.62 59.6,68.94 CMTMOD_Y.P$1 60.24,68.94 v60.24,68.62 | v54.84,58.77 54.84,59.41 C14.1 | C14.1 | v55.47,58.77 55.47,59.41 C14.1 | v41.19,62.9 41.19,63.73 C13.1 41.82,63.73 v41.82,62.9 | v45.31,72.11 44.99,72.11 DAA_Y.P$1 44.99,72.75 v45.31,72.75 | v47.85,75.6 47.85,74.97 R18.1 47.22,74.97 v47.22,75.6 | v58.33,71.79 57.51,71.79 C11.2 57.51,71.16 v58.33,71.16 | v57.7,67.03 57.06,67.03 R23.1 arc-90 v57.7,66.39 | v58.01,64.49 57.19,64.49 56.97,64.27 | 56.97,64.27 C15.1 | v58.01,63.86 57.38,63.86 56.97,64.27 | v49.44,67.03 v50.08,66.39 | v49.44,67.03 v49.44,66.39 U$12.GND@2 | v49.44,67.03 v48.81,66.39 | U$12.GND@2 v48.81,67.03 | U$12.GND@2 v49.44,67.03 | U$12.GND@2 v50.08,67.03 | U$12.GND@2 v50.08,67.67
  Top 0.254: U$12.GND@2 v48.81,67.67 | U$12.GND@2 v48.81,68.3 | U$12.GND@2 v50.08,68.3 | v49.44,68.3 v50.08,68.94 | U$12.GND@2 v49.44,68.94 | U$12.GND@2 v49.44,68.3 | v49.44,68.3 v48.81,68.94 | v87.86,68.62 87.86,68.94 CMTMOD_Z.P$1 88.49,68.94 v88.49,68.62 | v83.1,58.77 83.1,59.41 C21.1 | C21.1 | v83.73,58.77 83.73,59.41 C21.1 | v69.44,62.9 69.44,63.73 C20.1 70.08,63.73 v70.08,62.9 | v73.57,72.11 73.25,72.11 DAA_Z.P$1 73.25,72.75 v73.57,72.75 | v76.11,75.6 76.11,74.97 R26.1 75.48,74.97 v75.48,75.6 | v86.59,71.79 85.77,71.79 C18.2 85.77,71.16 v86.59,71.16 | v85.95,67.03 85.32,67.03 R31.1 arc-90 v85.95,66.39 | v86.27,64.49 85.45,64.49 85.22,64.27 | 85.22,64.27 C22.1 | v86.27,63.86 85.64,63.86 85.22,64.27 | v77.7,67.03 v78.33,66.39 | v77.7,67.03 v77.7,66.39 U$15.GND@2 | v77.7,67.03 v77.06,66.39 | U$15.GND@2 v77.06,67.03 | U$15.GND@2 v77.7,67.03 | U$15.GND@2 v78.33,67.03 | U$15.GND@2 v78.33,67.67 | U$15.GND@2 v77.06,67.67 | U$15.GND@2 v77.06,68.3 | U$15.GND@2 v78.33,68.3 | v77.7,68.3 v78.33,68.94 | U$15.GND@2 v77.7,68.94 | U$15.GND@2 v77.7,68.3 | v77.7,68.3 v77.06,68.94
  Top 0.305: v16.74,60.68 17,60.94 MOTOR_X.P$4 | U$7.GND@1 18.22,64.06 v18.64,64.49 | v45.63,60.68 45.89,60.94 MOTOR_Y.P$4 | U$12.GND@1 47.11,64.06 v47.54,64.49 | v73.89,60.68 74.15,60.94 MOTOR_Z.P$4 | U$15.GND@1 75.37,64.06 v75.79,64.49
  Bottom 0.254: U$5.P$5 25.84,24.26 25.73,24.14 U$5.GND | L2.P$2 v19.11,20.28 | v25.41,17.16 25.09,17.47 | v24.78,17.16 25.09,17.47 | 25.09,17.47 R14.1 | v29.54,27.63 29.54,27 C23.2 28.9,27 v28.9,27.63 | v29.86,19.7 29.86,20.33 30.01,20.49 | 30.01,20.49 C24.2 | v30.49,19.7 30.49,20.01 30.01,20.49
  Bottom 0.508: v25.73,21.92 U$5.GND v25.73,25.09 | v9.9,23.58 10.57,23.58 C6.2 10.3,23.82 v9.9,24.22 | v8.82,22.18 9.41,21.6 C7.2 9.86,21.55 9.46,21.55 | 9.46,21.55 v8.82,21.55 | v8.82,20.91 9.46,21.55 | v16.7,25.49 17.16,25.94 | C26.2 17.16,25.94 | v17.33,25.49 17.16,25.66 17.16,25.94
  other vias: 20.55,67.66 49.44,67.66 77.7,67.66
  pour Ground: 1.28,86.37 1.28,87.64 6.36,92.72 87.64,92.72 92.72,87.64 92.72,6.36 87.64,1.28 6.36,1.28 1.28,6.36
GPIO_DEBUG_3.4_X  (via drill 0.35)
  Top 0.254: v17.47,55.56 v17.48,55.57 21.91,55.57 25.09,52.39 25.09,50.18 25.73,49.54 U$4.7
  Bottom 0.254: U$3.P3.4_GPIO_DEBUG 16.33,61.5 16.03,61.2 16.03,56.97 17.18,55.82 17.22,55.82 v17.47,55.56
GPIO_DEBUG_3.4_Y  (via drill 0.35)
  Top 0.254: v46.37,57.15 v46.37,57.16 49.21,57.16 53.98,52.39 53.98,50.18 54.62,49.54 U$11.7
  Bottom 0.254: v46.37,57.15 46.11,57.4 46.07,57.4 44.92,58.55 44.92,61.2 45.23,61.5 U$10.P3.4_GPIO_DEBUG
GPIO_DEBUG_3.4_Z  (via drill 0.35)
  Top 0.254: v74.62,57.15 v74.63,57.16 77.47,57.16 82.24,52.39 82.24,50.18 82.88,49.54 U$14.7
  Bottom 0.254: v74.62,57.15 74.37,57.4 74.33,57.4 73.18,58.55 73.18,61.2 73.48,61.5 U$13.P3.4_GPIO_DEBUG
GPIO_DEBUG_3.5_X  (via drill 0.35)
  Top 0.254: 26.05,52.08 U$4.8 25.86,52.72 25.41,52.72 22.23,55.89 v22.23,56.84
  Bottom 0.254: v22.23,56.84 22.23,59.7 20.94,61 U$3.P3.5_GPIO_DEBUG
GPIO_DEBUG_3.5_Y  (via drill 0.35)
  Top 0.254: v46.37,58.11 48.91,58.11 54.94,52.08 U$11.8
  Bottom 0.254: U$10.P3.5_GPIO_DEBUG 46.71,61 46.37,60.65 v46.37,58.11
GPIO_DEBUG_3.5_Z  (via drill 0.35)
  Top 0.254: v74.62,58.11 77.16,58.11 83.2,52.08 U$14.8
  Bottom 0.254: U$13.P3.5_GPIO_DEBUG 74.97,61 74.62,60.65 v74.62,58.11
HN_X
  Top 0.254: 18.64,68.62 18.64,69.89
  Top 0.305: U$7.W_HN 18.29,67.31 18.64,67.67 18.64,68.62 U$7.V_HN | U$7.U_HN 18.3,69.92 18.33,69.89 18.64,69.89 R2.2 R3.1
HN_Y
  Top 0.254: 47.54,68.62 47.54,69.89
  Top 0.305: U$12.W_HN 47.19,67.31 47.54,67.67 47.54,68.62 U$12.V_HN | U$12.U_HN 47.19,69.92 47.22,69.89 47.54,69.89 R18.2 R19.1
HN_Z
  Top 0.254: 75.79,68.62 75.79,69.89
  Top 0.305: U$15.W_HN 75.44,67.31 75.79,67.67 75.79,68.62 U$15.V_HN | U$15.U_HN 75.45,69.92 75.48,69.89 75.79,69.89 R26.2 R27.1
HP_U_X  (via drill 0.35)
  Top 0.203: MOTOR_X.P$8 11.12,61.63 v12.29,60.46
  Top 0.254: v20.96,57.8 17.79,57.8 17.16,57.16 15.25,57.16 14.93,56.84 13.04,56.84 v12.72,57.16
  Top 0.305: 11.02,61.66 MOTOR_X.P$8 8.17,61.63 7.53,62.27 7.53,65.44 7.21,65.76 4.99,65.76 4.99,69.57 6.26,69.57 7.21,70.52 7.21,72.11 10.39,72.11 R4.2 | R4.2 10.07,70.53 | R4.2 10.66,70.56 U$7.U_HP
  Signal 0.254: v12.29,60.46 12.39,60.36 12.39,59.06 12.57,58.89 12.57,58.88 12.71,58.74 12.71,57.8 v12.72,57.16
  Bottom 0.254: U$3.P1.6_GPIO/PWM 20.13,59.5 20.65,60.02 21.6,59.06 21.6,58.43 v20.96,57.8
HP_U_Y  (via drill 0.35)  (1 unrouted)
  Top 0.254: MOTOR_Y.P$8 39.71,61.45 38.43,61.45 38.23,61.26 38.23,58.55 v38.06,58.38
  Top 0.305: 39.92,61.66 MOTOR_Y.P$8 37.06,61.63 36.42,62.27 36.42,65.44 36.11,65.76 33.88,65.76 33.88,69.57 35.15,69.57 36.11,70.52 36.11,72.11 39.28,72.11 R20.2 | R20.2 38.96,70.53 | R20.2 39.55,70.56 U$12.U_HP
  Signal 0.254: v38.06,58.38 38.11,58.43
HP_U_Z  (via drill 0.35)  (1 unrouted)
  Top 0.254: MOTOR_Z.P$8 68.36,61.63 v69.44,60.55
  Top 0.305: 68.17,61.66 MOTOR_Z.P$8 65.32,61.63 64.68,62.27 64.68,65.44 64.36,65.76 62.14,65.76 62.14,69.57 63.41,69.57 64.36,70.52 64.36,72.11 67.54,72.11 R28.2 | R28.2 67.22,70.53 | R28.2 67.81,70.56 U$15.U_HP
HP_V_X  (via drill 0.35)
  Top 0.203: 11.02,64.81 9.12,64.81 | MOTOR_X.P$7 12.5,61.4 v13.25,60.65
  Top 0.254: v14.1,57.87 14.27,58.03 v16.74,58.03
  Top 0.305: U$7.V_HP 9.76,69.27 R5.2 8.8,64.81 9.12,64.81 | MOTOR_X.P$7 11.98,61.63 11.66,61.95 11.66,62.28 11.34,62.59 11.34,64.81 11.02,64.81
  Signal 0.254: v13.25,60.65 13.03,60.43 13.03,59.06 13.21,58.89 13.21,58.88 13.35,58.74 13.35,58.26 13.74,57.87 v14.1,57.87
  Bottom 0.254: v16.74,58.03 16.99,58.29 17.13,58.29 17.55,58.7 17.55,59.29 17.48,59.35 17.48,59.69 17.78,60 U$3.P3.7_GPIO/PWM
HP_V_Y  (via drill 0.35)  (1 unrouted)
  Top 0.203: 39.92,64.81 38.01,64.81
  Top 0.254: MOTOR_Y.P$7 41.39,60.89 v41.29,60.78
  Top 0.305: U$12.V_HP 38.66,69.27 R21.2 37.69,64.81 38.01,64.81 | MOTOR_Y.P$7 40.87,61.63 40.55,61.95 40.55,62.28 40.23,62.59 40.23,64.81 39.92,64.81
HP_V_Z  (via drill 0.35)  (1 unrouted)
  Top 0.203: 68.17,64.81 66.27,64.81
  Top 0.254: MOTOR_Z.P$7 69.65,61.41 v70.4,60.65
  Top 0.305: U$15.V_HP 66.91,69.27 R29.2 65.95,64.81 66.27,64.81 | MOTOR_Z.P$7 69.13,61.63 68.81,61.95 68.81,62.28 68.49,62.59 68.49,64.81 68.17,64.81
HP_W_X  (via drill 0.35)
  Top 0.203: MOTOR_X.P$6 14,60.95 v14.3,60.65
  Top 0.254: v14.05,58.83 v14.05,58.82 13.98,58.75 16.59,58.75 v16.84,58.99
  Top 0.305: U$7.W_HP 17.61,67.98 16.74,67.98 16.74,68.62 11.66,68.62 10.07,67.03 R6.2 10.39,65.44 13.88,65.44 13.88,62.07 MOTOR_X.P$6
  Signal 0.254: v14.3,60.65 13.66,60.02 13.66,59.22 v14.05,58.83
  Bottom 0.254: U$3.P3.6_GPIO/PWM 17.64,60.5 16.84,59.7 v16.84,58.99
HP_W_Y  (via drill 0.35)  (1 unrouted)
  Top 0.254: MOTOR_Y.P$6 42.89,61.43 v42.25,60.78
  Top 0.305: U$12.W_HP 46.5,67.98 45.63,67.98 45.63,68.62 40.55,68.62 38.96,67.03 R22.2 39.28,65.44 42.77,65.44 42.77,62.07 MOTOR_Y.P$6
HP_W_Z  (via drill 0.35)  (1 unrouted)
  Top 0.254: MOTOR_Z.P$6 71.15,60.95 v71.45,60.65
  Top 0.305: U$15.W_HP 74.76,67.98 73.89,67.98 73.89,68.62 68.81,68.62 67.22,67.03 R30.2 67.54,65.44 71.03,65.44 71.03,62.07 MOTOR_Z.P$6
INT_VCC
  Bottom 0.254: U$5.P$7 27.88,23.26 28.59,22.55 C24.1
M_X_RX
  Bottom 0.254: U$3.P2.6_GPIO/PWM 15.6,62.48 16.12,61.96 16.71,61.96 18.36,63.61 23.38,63.61 23.8,63.2 23.8,59.09 25.25,57.64 28.55,57.64 SERIAL_X.2
M_X_TX
  Bottom 0.254: U$3.P2.5_GPIO 15.1,54.46 15.25,54.3 19.78,54.3 20.48,53.61 26.81,53.61 SERIAL_X.1
M_Y_RX
  Bottom 0.254: U$10.P2.6_GPIO/PWM 44.49,62.48 45.01,61.96 45.6,61.96 47.25,63.61 52.27,63.61 52.69,63.2 52.69,59.09 54.14,57.64 57.45,57.64 SERIAL_Y.2
M_Y_TX
  Bottom 0.254: U$10.P2.5_GPIO 43.99,54.46 44.14,54.3 48.68,54.3 49.37,53.61 55.7,53.61 SERIAL_Y.1
M_Z_RX
  Bottom 0.254: U$13.P2.6_GPIO/PWM 72.75,62.48 73.27,61.96 73.86,61.96 75.51,63.61 80.53,63.61 80.95,63.2 80.95,59.09 82.4,57.64 85.7,57.64 SERIAL_Z.2
M_Z_TX
  Bottom 0.254: U$13.P2.5_GPIO 72.25,54.46 72.4,54.3 76.93,54.3 77.63,53.61 83.96,53.61 SERIAL_Z.1
N$1
  Bottom 0.508: C25.2 D2.P$1 22.87,27 21.92,26.05 20.33,26.05 19.11,24.83 L2.P$1
N$13
  Top 0.254: LDO_5V.P$4 C17.2
N$14
  Top 0.254: LDO_3V3.P$4 C16.2
PWM_X  (via drill 0.35)
  Top 0.305: U$7.PWM 23.07,67.97 v22.45,67.35
  Signal 0.254: v22.45,67.35 22.45,65.95 21.6,65.1 20.65,65.1 v20.65,58.99
  Bottom 0.254: v20.65,58.99 U$3.P1.7_GPIO/PWM
PWM_Y  (via drill 0.35)
  Top 0.305: U$12.PWM 51.96,67.97 v51.35,67.35
  Signal 0.254: v51.35,67.35 51.35,65.95 50.49,65.1 50.49,59.95 v51.13,59.31
  Bottom 0.254: U$10.P1.7_GPIO/PWM 50.81,59 v51.13,59.31
PWM_Z  (via drill 0.35)
  Top 0.305: U$15.PWM 80.22,67.97 v79.6,67.35
  Signal 0.254: v79.6,67.35 79.6,65.95 78.75,65.1 77.8,65.1 v77.8,58.99
  Bottom 0.254: v77.8,58.99 U$13.P1.7_GPIO/PWM
RD_X  (via drill 0.35)
  Top 0.305: U$7.RD 24.33,67.31 24.36,67.35 24.36,67.98 27.22,67.98 R1.1 | R1.1 27,68.94 | R1.1 v26.26,68.94
  Bottom 0.254: 13.1,65.21 U$3.P4.0_GPIO 13.1,68.66 14.3,69.86 25.34,69.86 v26.26,68.94
RD_Y  (via drill 0.35)
  Top 0.305: U$12.RD 53.22,67.31 53.25,67.35 53.25,67.98 56.11,67.98 R17.1 | R17.1 55.89,68.94 | R17.1 v55.16,68.94
  Bottom 0.254: 41.99,65.21 U$10.P4.0_GPIO 41.99,68.66 43.19,69.86 54.23,69.86 v55.16,68.94
RD_Z  (via drill 0.35)
  Top 0.305: U$15.RD 81.48,67.31 81.51,67.35 81.51,67.98 84.37,67.98 R25.1 | R25.1 84.15,68.94 | R25.1 v83.41,68.94
  Bottom 0.254: 70.25,65.21 U$13.P4.0_GPIO 70.25,68.66 71.45,69.86 82.49,69.86 v83.41,68.94
RETRY_X
  Top 0.305: U$7.RETRY 24.26,69.92 25.5,71.16 C1.1
RETRY_Y
  Top 0.305: U$12.RETRY 53.15,69.92 54.39,71.16 C11.1
RETRY_Z
  Top 0.305: U$15.RETRY 81.41,69.92 82.65,71.16 C18.1
RXD_X  (via drill 0.35)
  Top 0.254: U$4.4 24.64,43.77 24.64,51.76 v23.82,51.76
  Signal 0.254: v23.82,51.76 23.82,60.21 v22.38,61.65
  Bottom 0.254: v22.38,61.65 21.53,62.5 U$3.P2.1_RXD
RXD_Y  (via drill 0.35)
  Top 0.254: U$11.4 53.53,43.77 53.53,52.08 v53.03,52.08
  Signal 0.254: v53.03,52.08 53.03,59.89 v51.27,61.65
  Bottom 0.254: v51.27,61.65 50.42,62.5 U$10.P2.1_RXD
RXD_Z  (via drill 0.35)
  Top 0.254: U$14.4 81.78,43.77 81.78,52.08 v81.29,52.08
  Signal 0.254: v81.29,52.08 81.29,59.89 v79.53,61.65
  Bottom 0.254: v79.53,61.65 78.68,62.5 U$13.P2.1_RXD
SBWTCK_X  (via drill 0.35)
  Top 0.254: U$4.SBWTCK 23.19,37.35 23.19,48.27 v22.55,48.27
  Signal 0.254: v22.55,48.27 21.59,48.27 21.02,47.7 20.28,47.7 19.76,48.22 19.76,49.47 15.11,54.11 15.11,67.27 v14.62,67.76
  Bottom 0.254: v14.62,67.76 16.09,66.28 U$3.SBWTCK
SBWTCK_Y  (via drill 0.35)
  Top 0.254: U$11.SBWTCK 52.08,37.35 52.08,48.27 v51.45,48.27
  Signal 0.254: v51.45,48.27 50.48,48.27 49.91,47.7 49.17,47.7 48.65,48.22 48.65,49.47 44,54.11 44,67.27 v43.51,67.76
  Bottom 0.254: v43.51,67.76 44.99,66.28 U$10.SBWTCK
SBWTCK_Z  (via drill 0.35)
  Top 0.254: U$14.SBWTCK 80.34,37.35 80.34,48.27 v79.7,48.27
  Signal 0.254: v79.7,48.27 78.74,48.27 78.17,47.7 77.43,47.7 76.91,48.22 76.91,49.47 72.26,54.11 72.26,67.27 v71.77,67.76
  Bottom 0.254: v71.77,67.76 73.25,66.28 U$13.SBWTCK
SBWTDIO_X  (via drill 0.35)
  Top 0.254: U$4.2 23.68,39.65 23.68,49.54 v23.19,49.54
  Signal 0.254: v15.89,67.76 15.57,67.45 15.57,54.3 20.33,49.54 v23.19,49.54
  Bottom 0.254: v15.89,67.76 16.59,67.05 U$3.SBWTDIO
SBWTDIO_Y  (via drill 0.35)
  Top 0.254: U$11.2 52.58,39.65 52.58,49.54 v52.08,49.54
  Signal 0.254: v44.78,67.76 44.46,67.45 44.46,54.3 49.22,49.54 v52.08,49.54
  Bottom 0.254: v44.78,67.76 45.49,67.05 U$10.SBWTDIO
SBWTDIO_Z  (via drill 0.35)
  Top 0.254: U$14.2 80.83,39.65 80.83,49.54 v80.34,49.54
  Signal 0.254: v73.03,67.76 72.72,67.45 72.72,54.3 77.48,49.54 v80.34,49.54
  Bottom 0.254: v73.03,67.76 73.75,67.05 U$13.SBWTDIO
SW
  Bottom 0.254: L2.P$3 21.02,19.06 21.92,19.06 23.19,20.33 23.19,23.51 23.44,23.76 U$5.P$3 U$5.P$4 24.78,24.28 24.78,25.09 25.02,25.34 25.02,25.61 26.36,26.95 C25.1
SYNC1  (via drill 0.35)
  Top 0.254: v40.97,59.06 45.09,59.06 45.54,59.51 46.34,59.51 46.41,59.59 49.53,59.59 50.83,58.29 51.83,58.29 v52.08,58.54
  Signal 0.254: 39.09,58.36 40.31,58.36 40.99,59.04 v40.97,59.06 | U$2.P$45 43.19,77.84 37.9,72.55 37.9,59.55 39.09,58.36 | v11.76,58.11 11.76,56.82 17.85,50.72 17.85,48.22 18.83,47.24 23.58,47.24 25.09,45.73 27.63,45.73 39.09,57.18 39.09,58.36 | v68.59,57.15 66.69,57.16 54.94,57.16 v54.94,56.52
  Bottom 0.254: U$3.P7.2_SYNC1 11.58,64.33 11.58,58.88 11.76,58.7 v11.76,58.11 | U$10.P7.2_SYNC1 40.49,63.43 40.48,63.42 40.48,59.55 v40.97,59.06 | U$13.P7.2_SYNC1 68.75,63.43 68.73,63.42 68.73,57.3 v68.59,57.15 | v54.94,56.52 54.28,57.18 53.95,57.18 52.6,58.54 v52.08,58.54
SYNC2  (via drill 0.35)
  Top 0.254: v40.02,57.16 40.33,57.16 41.78,58.61 45.28,58.61 45.46,58.79 46.04,58.79 46.07,58.82 49.65,58.82 50.65,57.83 53.62,57.83 53.8,57.66 57.22,57.66 57.71,57.16 61.92,57.16 62.88,58.11 v67.95,58.11
  Signal 0.254: v39.38,59.06 39.38,60.18 39.65,60.45 39.65,66.37 38.35,67.66 38.35,71.5 U$2.P$49 | v10.73,58.11 11.05,57.8 11.05,56.88 17.4,50.53 17.4,48.03 22.06,43.37 26.69,43.37 27.33,44.01 27.33,44.78 39.71,57.16 v40.02,57.16
  Bottom 0.254: U$3.PJ.3_SYNC2 11.12,64.32 11.12,59.06 10.73,58.67 v10.73,58.11 | U$10.PJ.3_SYNC2 39.99,59.67 v39.38,59.06 39.38,57.8 v40.02,57.16 | U$13.PJ.3_SYNC2 68.25,58.4 v67.95,58.11
TXD_X  (via drill 0.35)
  Top 0.254: U$4.3 24.14,41.48 24.14,50.81 v23.51,50.81
  Signal 0.254: v16.41,62.67 16.41,61.36 16.03,60.97 16.03,54.79 19.06,51.76 21.28,51.76 22.23,50.81 v23.51,50.81
  Bottom 0.254: U$3.P2.0_TXD 17.09,63.35 v16.41,62.67
TXD_Y  (via drill 0.35)
  Top 0.254: U$11.3 53.03,41.48 53.03,50.81 v52.4,50.81
  Signal 0.254: v45.3,62.67 45.3,61.36 44.92,60.97 44.92,57.02 51.13,50.81 v52.4,50.81
  Bottom 0.254: U$10.P2.0_TXD 45.99,63.35 v45.3,62.67
TXD_Z  (via drill 0.35)
  Top 0.254: U$14.3 81.29,41.48 81.29,50.81 v80.66,50.81
  Signal 0.254: v73.56,62.67 73.56,61.36 73.18,60.97 73.18,57.02 79.39,50.81 v80.66,50.81
  Bottom 0.254: U$13.P2.0_TXD 74.25,63.35 v73.56,62.67
U_X
  Top 0.305: U$7.U 20.14,64.72 18.5,63.08 MOTOR_X.P$3
U_Y
  Top 0.305: U$12.U 49.03,64.72 47.39,63.08 MOTOR_Y.P$3
U_Z
  Top 0.305: U$15.U 77.29,64.72 75.65,63.08 MOTOR_Z.P$3
V_X
  Top 0.305: U$7.V 20.44,64.06 20,63.62 MOTOR_X.P$2
V_Y
  Top 0.305: U$12.V 49.33,64.06 48.89,63.62 MOTOR_Y.P$2
V_Z
  Top 0.305: U$15.V 77.59,64.06 77.15,63.62 MOTOR_Z.P$2
VBAT  (via drill 0.35)  (1 unrouted)
  Top 0.254: 66.05,83.22 64.78,81.95 64.78,80.89 66.05,79.62 | U$2.P$83 66.05,83.22 | 66.05,83.22 67.32,81.95 67.32,80.89 66.05,79.62 | 66.05,79.62 U$2.P$81 66.05,77.48 | 66.05,77.48 66.69,76.84 83.2,76.84 83.2,80.34 82.88,80.65 LDO_5V.P$1 | 66.05,77.48 65.42,76.84 v33.66,76.84 12.71,76.84 12.16,77.4 LDO_3V3.P$1 | v28.77,23.37 28.77,21.15 v28.59,20.96
  Top 0.508: v22.23,23.82 27.32,23.82 v27.79,24.3 | v30.17,51.76 29.86,51.45 29.86,31.76 30.49,31.12
  Signal 0.508: v33.66,76.84 32.71,75.89 32.71,54.94 30.17,52.4 v30.17,51.76
  Bottom 0.254: U$5.P$6 27.25,23.76 v27.79,24.3 | R12.1 27.32,20.96 | R12.1 | C23.1 29.22,23.82 v28.77,23.37 | v28.59,20.96 27.63,20.96 R12.1
  Bottom 0.508: v32.08,26.05 30.81,24.78 C23.1 28.27,24.78 v27.79,24.3 | L2.P$4 21.81,24.25 v22.23,23.82
VCP_X
  Top 0.305: C3.2 12.8,67.03 16.74,67.03 17.1,66.67 U$7.VCP
VCP_Y
  Top 0.305: C13.2 41.69,67.03 45.63,67.03 46,66.67 U$12.VCP
VCP_Z
  Top 0.305: C20.2 69.95,67.03 73.89,67.03 74.25,66.67 U$15.VCP
VINT_X  (via drill 0.35)
  Top 0.152: 10.05,59.79 10.05,59.75 10.07,59.73
  Top 0.254: C4.2 25.44,61.63 25.07,62 23.77,62 23.6,61.83 | v10.05,60.9 10.05,59.79
  Top 0.305: R4.1 6.9,69.25 R5.1 6.9,67.35 7.02,67.22 7.74,67.22 8.04,66.92 8.04,63.98 8.17,63.86 R6.1 | R6.1 | MOTOR_X.P$5 15.47,61.6 15.47,59.73 | 10.07,59.73 15.47,59.73 | v10.05,62.52 10.07,62.54 R6.1 | 15.47,59.73 21.5,59.73 23.6,61.83 | 26.26,65.44 26.58,65.12 26.58,61.95 26.26,61.95 C4.2 | U$7.VINT 24.42,66.02 24.68,65.76 24.68,65.44 26.26,65.44 | 26.26,65.44 29.76,65.44 29.76,66.39 30.07,66.71 30.07,67.98 R1.2 29.12,69.25 28.17,70.2 27.22,70.2 26.9,70.52 26.9,72.74 26.95,72.8 R8.1 | R8.1 29.44,73.7 30.07,73.06 CMTMOD_X.P$3 | 26.75,74.8 | R8.1 26.75,74.8 | DAA_X.P$3 11.98,73.39 12.93,74.33 15.8,74.33 17.8,76.34 20.33,76.34 20.55,76.12 20.55,74.65 R3.2 21.19,74.97 26.58,74.97 26.75,74.8
  Signal 0.305: v10.05,60.9 v10.05,62.52
VINT_Y  (via drill 0.35)
  Top 0.254: 53.57,62.9 50.71,60.05 46.22,60.05 46.15,59.97 44.51,59.97 44.36,60.12 44.36,60.05 | 38.96,60.05 38.96,60.72 v38.94,60.74
  Top 0.305: R20.1 35.79,69.25 R21.1 35.79,67.35 35.91,67.22 36.63,67.22 36.93,66.92 36.93,63.98 37.06,63.86 R22.1 | R22.1 | MOTOR_Y.P$5 44.36,61.6 44.36,60.05 38.96,60.05 | v38.94,62.52 38.96,62.54 R22.1 | 55.16,62.9 55.47,62.9 55.47,65.12 55.16,65.44 | 55.16,62.9 53.57,62.9 | U$12.VINT 53.31,66.02 53.57,65.76 53.57,65.44 55.16,65.44 | C14.2 55.16,62.9 | 55.16,65.44 58.65,65.44 58.65,66.39 58.97,66.71 58.97,67.98 R17.2 58.01,69.25 57.06,70.2 56.11,70.2 55.79,70.52 55.79,72.74 55.85,72.8 R24.1 | R24.1 58.33,73.7 58.97,73.06 CMTMOD_Y.P$3 | 55.64,74.8 | R24.1 55.64,74.8 | DAA_Y.P$3 40.87,73.39 41.82,74.33 44.69,74.33 46.69,76.34 49.22,76.34 49.44,76.12 49.44,74.65 R19.2 50.08,74.97 55.47,74.97 55.64,74.8
  Signal 0.305: v38.94,60.74 v38.94,62.52
VINT_Z  (via drill 0.35)
  Top 0.254: v67.2,59.79 67.2,59.75 67.22,59.73
  Top 0.305: R28.1 64.05,69.25 R29.1 64.05,67.35 64.17,67.22 64.89,67.22 65.19,66.92 65.19,63.98 65.32,63.86 R30.1 | R30.1 | MOTOR_Z.P$5 72.62,61.6 72.62,59.73 | 67.22,59.73 72.62,59.73 | v67.2,62.52 67.22,62.54 R30.1 | 72.62,59.73 78.65,59.73 81.83,62.9 83.41,62.9 | 83.41,62.9 83.73,62.9 83.73,65.12 83.41,65.44 | U$15.VINT 81.57,66.02 81.83,65.76 81.83,65.44 83.41,65.44 | C21.2 83.41,62.9 | 83.41,65.44 86.91,65.44 86.91,66.39 87.22,66.71 87.22,67.98 R25.2 86.27,69.25 85.32,70.2 84.37,70.2 84.05,70.52 84.05,72.74 84.1,72.8 R32.1 | R32.1 86.59,73.7 87.22,73.06 CMTMOD_Z.P$3 | 83.89,74.8 | R32.1 83.89,74.8 | DAA_Z.P$3 69.13,73.39 70.08,74.33 72.95,74.33 74.95,76.34 77.48,76.34 77.7,76.12 77.7,74.65 R27.2 78.34,74.97 83.73,74.97 83.89,74.8
  Signal 0.305: v67.2,59.79 v67.2,62.52
VM  (via drill 0.35)  (1 unrouted)
  Top 0.254: 23.41,62.9 v23.09,62.9 v22.45,62.9 | v51.98,62.9 52.3,62.9 | v80.24,62.9 80.56,62.9
  Top 0.305: U$7.VM 23.99,65.36 C5.2 24.68,64.17 23.41,62.9 | U$12.VM 52.88,65.36 C15.2 53.57,64.17 52.3,62.9 | U$15.VM 81.14,65.36 C22.2 81.83,64.17 80.56,62.9
  Top 0.508: 16.08,32.9 27.37,32.9 27.89,33.43 v27.89,40.02 27.89,52.66 27,53.55 27,56.32 25.06,58.26 25.06,61.01 v24.78,61.29 | v24.78,62.7 24.78,63.77 C5.2
  Signal 0.508: v24.78,61.29 v24.78,62.7 | v51.98,62.9 51.98,62.12 53.87,60.23 53.87,49.51 53.03,48.68 53.03,46.37 | 53.03,46.37 46.68,40.02 v27.89,40.02 | v80.24,62.9 v79.6,62.9 79.6,62.76 82.12,60.23 82.12,45.85 80.42,44.14 56.52,44.14 56.35,44.32 56.35,44.97 55.53,45.78 54.88,45.78 54.29,46.37 53.03,46.37
  Bottom 0.508: R13.2 14.3,19.38 13.35,20.33 13.35,21.6 | 13.35,23.82 13.35,21.6 | 13.35,23.82 13.35,24.78 14.3,25.73 C27.1 15.8,26.59 15.8,27.54 16.07,27.81 17.16,27.81 | C7.1 13.35,21.6 | C6.1 13.35,23.82 | 17.16,27.81 18.24,27.81 19.05,27 D2.P$2 | 17.16,27.81 C26.1
W_X
  Top 0.305: U$7.W 16.96,64.72 16.74,64.49 16.74,63.54 17.69,62.59 17.69,61 18.01,60.68 21.18,60.68 21.5,61 MOTOR_X.P$1
W_Y
  Top 0.305: U$12.W 45.86,64.72 45.63,64.49 45.63,63.54 46.58,62.59 46.58,61 46.9,60.68 50.08,60.68 50.39,61 MOTOR_Y.P$1
W_Z
  Top 0.305: U$15.W 74.11,64.72 73.89,64.49 73.89,63.54 74.84,62.59 74.84,61 75.16,60.68 78.33,60.68 78.65,61 MOTOR_Z.P$1